# Altium PCB ECG_Monitor_Final.PcbDoc
Units mm, origin at the board's own origin, x right, y up, seen from the top; angles counter-clockwise.
Board outline 95 x 87 mm, 2 copper layers (Top Layer, Bottom Layer); 58 components, 40 nets, 156 pads, 1 vias.
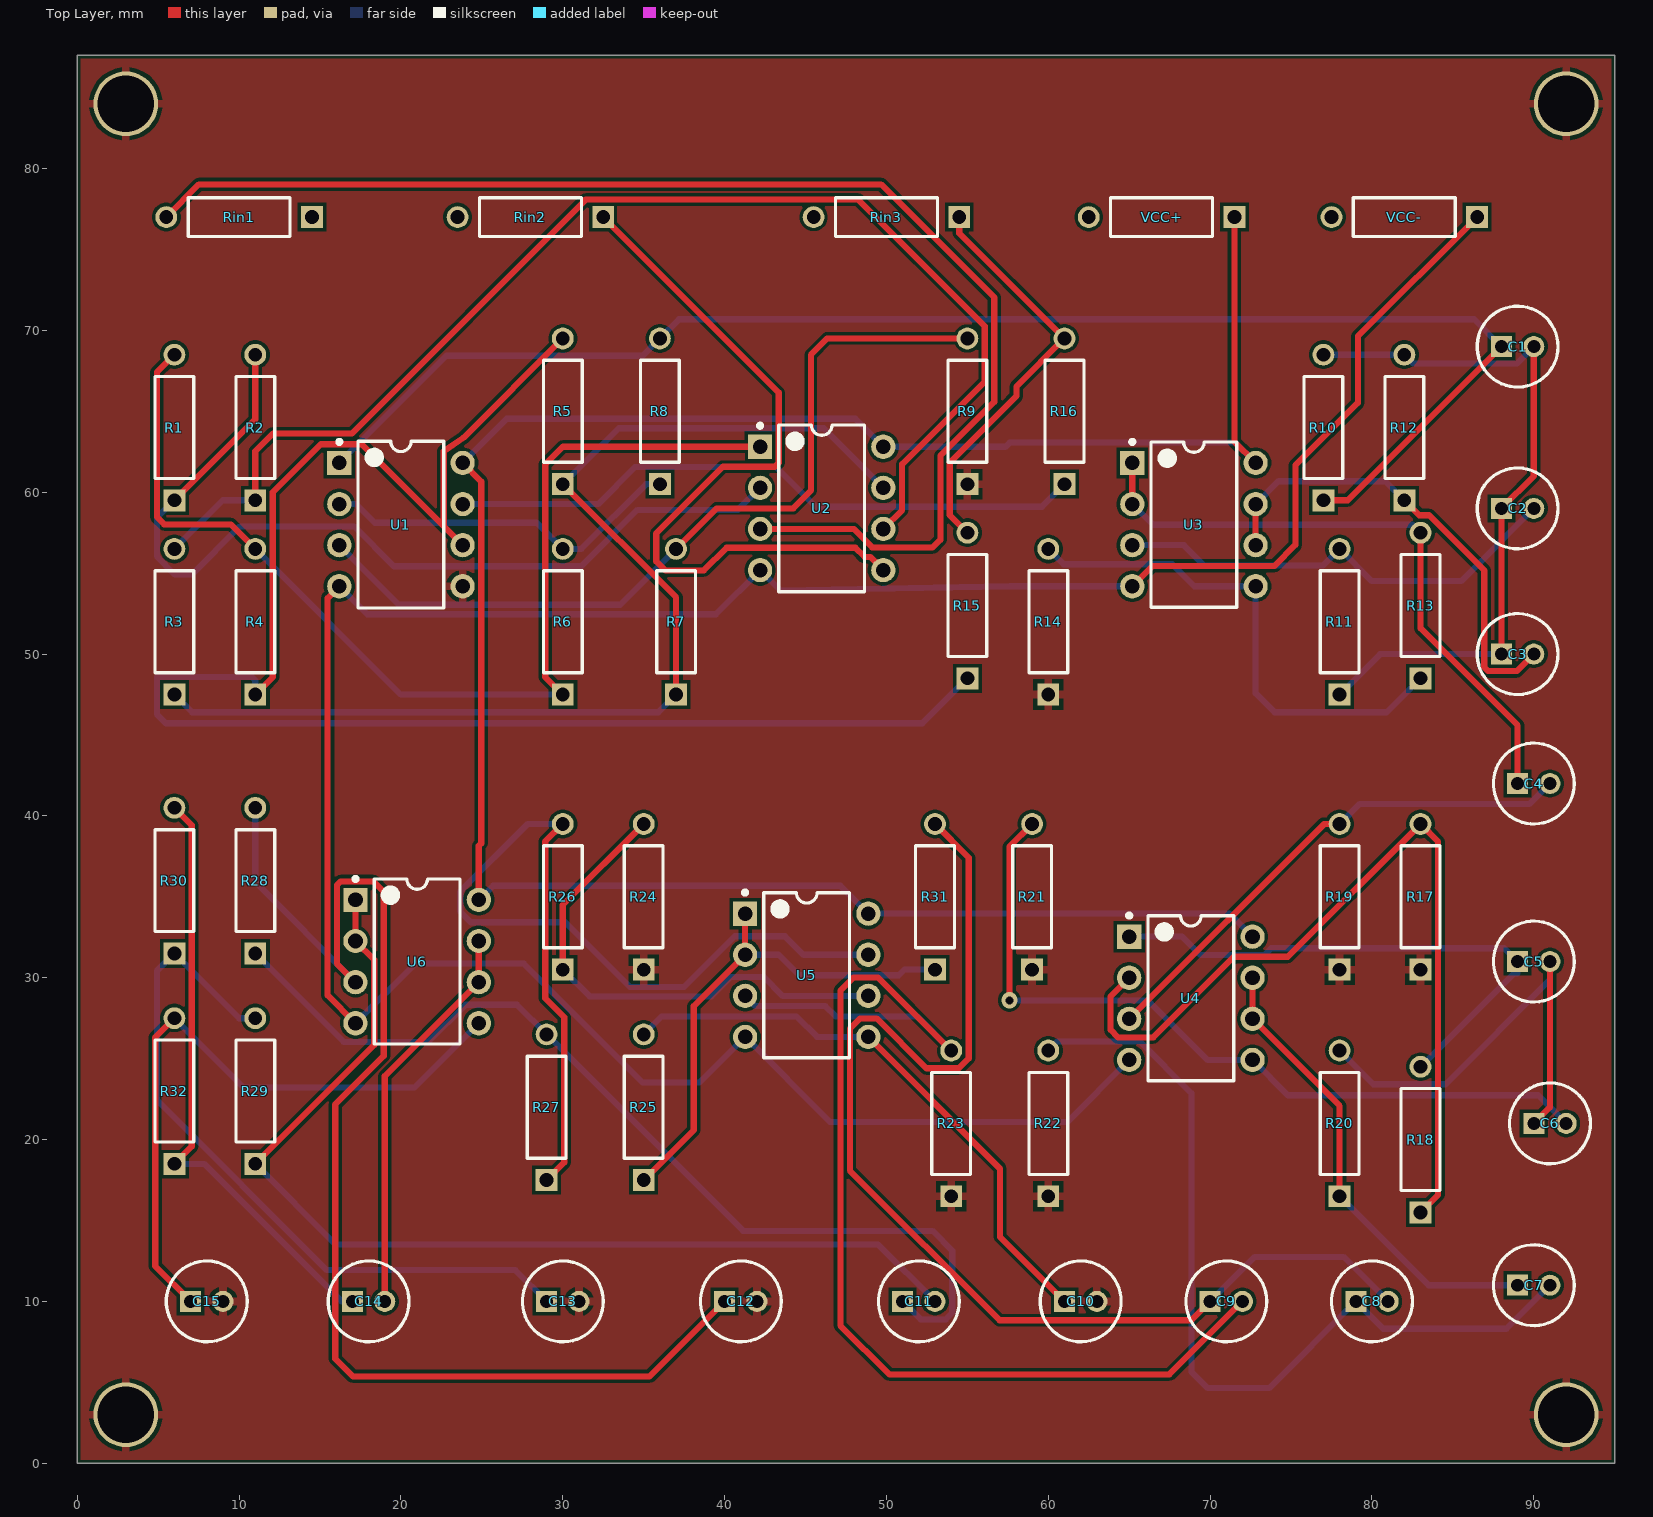
[diagram p0: Top Layer view]
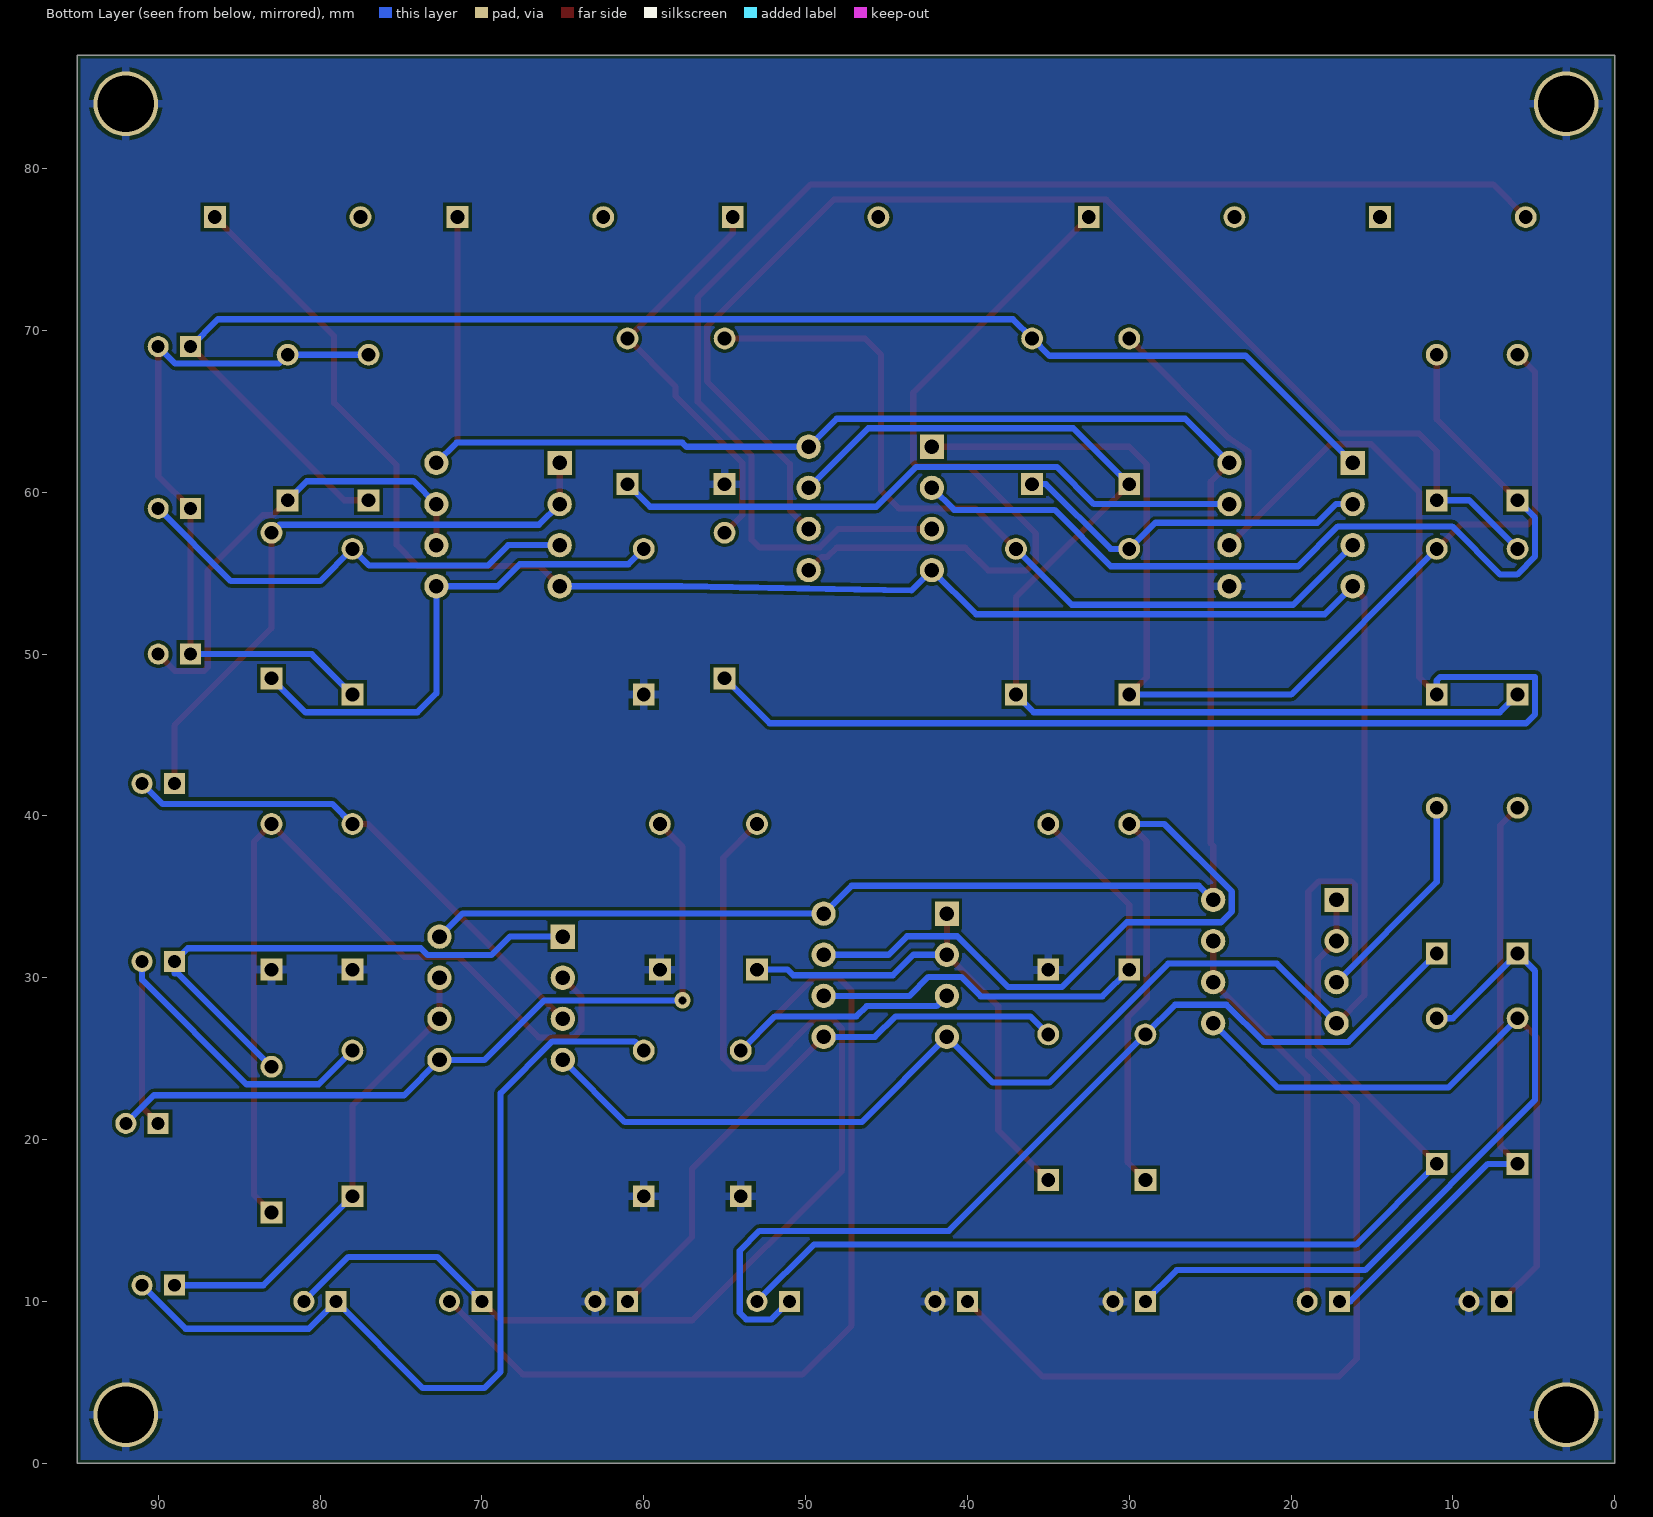
[diagram p1: Bottom Layer view, seen from below]

## Layer stack, top to bottom
Top Solder: solder mask 0.0102, Solder Resist, Dk 3.5
Top Layer: signal copper 0.0356
Dielectric 1: dielectric 0.32, FR-4, Dk 4.8
Bottom Layer: signal copper 0.0356
Bottom Solder: solder mask 0.0102, Solder Resist, Dk 3.5

## Board outline
0,0 95,0 95,87 0,87

## Design rules (kind name [scope] priority, off if disabled: settings)
BoardOutlineClearance [All] p1: gap=0.2 ignorepadtopadclearanceinfootprint=FALSE except(0.4: Arc-SplitBarrior Arc-SplitContinuation Track-SplitBarrior Track-SplitContinuation SMDPad-SplitBarrior SMDPad-SplitContinuation THPad-SplitBarrior THPad-SplitContinuation Via-SplitBarrior Via-SplitContinuation Fill-SplitBarrior Fill-SplitContinuation Poly-SplitBarrior Poly-SplitContinuation Region-SplitBarrior Region-SplitContinuation Text-SplitBarrior Text-SplitContinuation)
Clearance "Clearance Bottom Layer" [OnLayer('Bottom Layer')] p1: gap=0.203 ignorepadtopadclearanceinfootprint=TRUE except(0.254: Arc-Text Track-Text SMDPad-Text THPad-Text Via-Text Fill-Text Poly-Text Region-Text Text-Text)
Clearance "Clearance Top Layer" [OnLayer('Top Layer')] p2: gap=0.203 ignorepadtopadclearanceinfootprint=TRUE except(0.254: Arc-Text Track-Text SMDPad-Text THPad-Text Via-Text Fill-Text Poly-Text Region-Text Text-Text)
Clearance [All] p3: gap=0.2 ignorepadtopadclearanceinfootprint=FALSE except(0.089: Arc-Arc Arc-Track Arc-SMDPad Track-Track Track-SMDPad SMDPad-SMDPad; 0.127: Arc-Via Track-Via SMDPad-Via THPad-Via Via-Via; 0.254: Arc-Text Track-Text SMDPad-Text THPad-Text Via-Text Fill-Text Poly-Text Region-Text Text-Text)
HoleSize [All] p1: absolutevalues=TRUE maxlimit=6.3 minlimit=0.2 maxpercent=80.000 minpercent=20.000
MinimumAnnularRing [All] p1: minimumring=0.076
MinimumSolderMaskSliver [All] p1: minsoldermaskwidth=0.1
PolygonConnect PolygonConnect_1 [All] p1: thpad.connectstyle=Relief thpad.reliefconductorwidth=0.508 thpad.reliefentries=4 thpad.polygonreliefangle="90 Angle" thpad.airgapwidth=0.254 smdpad.connectstyle=Relief smdpad.reliefconductorwidth=0.508 smdpad.reliefentries=4 smdpad.polygonreliefangle="90 Angle" smdpad.airgapwidth=0.254 via.connectstyle=Direct via.reliefconductorwidth=0.508 via.reliefentries=4 via.polygonreliefangle="90 Angle" via.airgapwidth=0.254
RoutingCorners [All] p1: cornerstyle=Round minsetback=2.54 maxsetback=2.54
RoutingVias [All] p1: holewidth=0.5 width=1 viastyle="Through Hole" minholewidth=0.2 minwidth=0.45 maxholewidth=1 maxwidth=2
SilkToSilkClearance [All] p1: silktosilkclearance=0.1
SilkToSolderMaskClearance [IsPad] p1: minsilkscreentomaskgap=0.1 clearancetoexposedcopper=TRUE
SolderMaskExpansion [All] p1: expansion=0.102 istentingtop=FALSE
Width [All] p1: maxlimit=2.54 minlimit=0.089 preferedwidth=0.381
25 further rules are at their usual default settings.

## Components (designator, comment, footprint, x,y, rotation, side; value= is the part's Value field where it differs from the comment)
C1 "ECA1HM100" CAPPR55-200-1100X500X1200 89,69 r0 top
C2 "ECA1HM100" CAPPR55-200-1100X500X1200 89,59 r0 top
C3 "ECA1HM100" CAPPR55-200-1100X500X1200 89,50 r0 top
C4 "ECA1HM100" CAPPR55-200-1100X500X1200 90,42 r0 top
C5 "ECA1HM100" CAPPR55-200-1100X500X1200 90,31 r0 top
C6 "ECA1HM100" CAPPR55-200-1100X500X1200 91,21 r0 top
C7 "ECA1HM100" CAPPR55-200-1100X500X1200 90,11 r0 top
C8 "ECA1HM100" CAPPR55-200-1100X500X1200 80,10 r0 top
C9 "ECA1HM100" CAPPR55-200-1100X500X1200 71,10 r0 top
C10 "ECA1HM100" CAPPR55-200-1100X500X1200 62,10 r0 top
C11 "ECA1HM100" CAPPR55-200-1100X500X1200 52,10 r0 top
C12 "ECA1HM100" CAPPR55-200-1100X500X1200 41,10 r0 top
C13 "ECA1HM100" CAPPR55-200-1100X500X1200 30,10 r0 top
C14 "ECA1HM100" CAPPR55-200-1100X500X1200 18,10 r0 top
C15 "ECA1HM100" CAPPR55-200-1100X500X1200 8,10 r0 top
R1 "" RESA60-630X240 6,64 r90 top
R2 "" RESA60-630X240 11,64 r90 top
R3 "" RESA60-630X240 6,52 r90 top
R4 "" RESA60-630X240 11,52 r90 top
R5 "" RESA60-630X240 30,65 r90 top
R6 "" RESA60-630X240 30,52 r90 top
R7 "" RESA60-630X240 37,52 r90 top
R8 "" RESA60-630X240 36,65 r90 top
R9 "" RESA60-630X240 55,65 r90 top
R10 "" RESA60-630X240 77,64 r90 top
R11 "" RESA60-630X240 78,52 r90 top
R12 "" RESA60-630X240 82,64 r90 top
R13 "" RESA60-630X240 83,53 r90 top
R14 "" RESA60-630X240 60,52 r90 top
R15 "" RESA60-630X240 55,53 r90 top
R16 "" RESA60-630X240 61,65 r90 top
R17 "" RESA60-630X240 83,35 r90 top
R18 "" RESA60-630X240 83,20 r90 top
R19 "" RESA60-630X240 78,35 r90 top
R20 "" RESA60-630X240 78,21 r90 top
R21 "" RESA60-630X240 59,35 r90 top
R22 "" RESA60-630X240 60,21 r90 top
R23 "" RESA60-630X240 54,21 r90 top
R24 "" RESA60-630X240 35,35 r90 top
R25 "" RESA60-630X240 35,22 r90 top
R26 "" RESA60-630X240 30,35 r90 top
R27 "" RESA60-630X240 29,22 r90 top
R28 "" RESA60-630X240 11,36 r90 top
R29 "" RESA60-630X240 11,23 r90 top
R30 "" RESA60-630X240 6,36 r90 top
R31 "" RESA60-630X240 53,35 r90 top
R32 "" RESA60-630X240 6,23 r90 top
Rin1 "" RESA60-630X240 10,77 r180 top
Rin2 "" RESA60-630X240 28,77 r180 top
Rin3 "" RESA60-630X240 50,77 r180 top
U1 "LM4562NA" N08E 20,58 r0 top
U2 "LM4562NA" N08E 46,59 r0 top
U3 "TL072CP" P0008A 69,58 r0 top
U4 "TL072CP" P0008A 68.81,28.73 r0 top
U5 "TL072CP" P0008A 45.074,30.151 r0 top
U6 "TL072CP" P0008A 21,31 r0 top
VCC+ "" RESA60-630X240 67,77 r180 top
VCC- "" RESA60-630X240 82,77 r180 top

## Footprints (in the part's own frame and the unit in brackets; to place one, negate y for a bottom-side part, rotate by r counter-clockwise, add the part's x,y. Pads: shape width x height; smd on the part's side, far side on the other; paste and mask are expansions set on the pad)
CAPPR55-200-1100X500X1200 [mm] "THD, 2-Leads, Dia 5mm, Body Length 11mm"
  rect 1.3x1.3 hole 0.8: 1(-1,0)
  round 1.3 hole 0.8: 2(1,0)
  silkscreen extent -2.5,-2.5 2.5,2.5, body extent -2.5,-2.5 2.5,2.5, height 12
N08E [mm] "DIP, 8-Pin, Row Spacing 7.62 mm, Pitch 2.54 mm"
  rect 1.5x1.5 hole 0.9: 1(-3.81,3.81)
  round 1.5 hole 0.9: 2(-3.81,1.27) 3(-3.81,-1.27) 4(-3.81,-3.81) 5(3.81,-3.81) 6(3.81,-1.27) 7(3.81,1.27) 8(3.81,3.81)
  silkscreen extent -3.93,-5.15 2.65,5.23, body extent -3.6,-5.15 3.6,5.15, height 5.33
P0008A [mm] "DIP, 8-Leads, Body 10.15x6.6mm, Pitch 2.54mm"
  rect 1.5x1.5 hole 0.9: 1(-3.81,3.81)
  round 1.5 hole 0.9: 2(-3.81,1.27) 3(-3.81,-1.27) 4(-3.81,-3.81) 5(3.81,-3.81) 6(3.81,-1.27) 7(3.81,1.27) 8(3.81,3.81)
  silkscreen extent -3.93,-5.1 2.65,5.23, body extent -3.95,-5.07 3.95,5.07, height 5.08
RESA60-630X240 [mm] "Axial Resistor, 2-Leads, Dia 2.4mm, Body Length 6.3mm"
  rect 1.35x1.35 hole 0.85: 1(-4.5,0)
  round 1.35 hole 0.85: 2(4.5,0)
  silkscreen extent -3.15,-1.2 3.15,1.2, body extent -3.15,-1.2 3.15,1.2, height 2.4

## Part data
C1 C2 C3 C4 C5 C6 C7 C8 C9 C10 C11 C12 C13 C14 C15: library part CMP-1665-00038-2, "Aluminum Electrolytic Capacitor, 10 uF, +/- 20%, 50 V, -40 to 85 degC, 2-Pin THD, RoHS, Bulk", Capacitance=10uF, Case/Package=Radial, Dielectric Material=Aluminium, Leakage Current=3uA, Manufacturer=Panasonic, Max Operating Temperature=85degC, Min Operating Temperature=-40degC, Package Description="2-Pin Radial Lead, Dia 5 mm, Height 12 mm", Package Quantity=200, Package Reference=CAPPR55-200-1100X500X1200, Ripple Current=65mA, Tolerance=20%, Voltage=50V, Datasheet URL=https://industrial.panasonic.com/cdbs/www-data/pdf/RDF0000/ABA0000C1218.pdf, Datasheet Version="Rev. 05, 10/2016", Diameter=5mm, Dissipation Factor=0.12%, Height=11mm, Height - Seated (Max)=0.472inch, Lead Diameter=0.5mm, Lead Free=LeadFree, Lead Pitch=2mm, Lead/Base Style=Straight, Length=11mm, Life (Hours)=2000Hour, Manufacturer URL=http://www.panasonic.com/, Mount=ThroughHole, Number of Pins=2, Packaging=Bulk, Radiation Hardening=No, REACH SVHC=NoSVHC, Ripple Current (AC)=65mA, RoHSCompliant=true, Termination=Radial, Voltage Rating=50V, Voltage Rating (DC)=50V
R1 R2 R3 R4 R5 R6 R7 R8 R9 R10 R11 R12 R13 R14 R15 R16 R17 R18 R19 R20 R21 R22 R23 R24 R25 R26 R27 R28 R29 R30 R31 R32 Rin1 Rin2 Rin3 VCC+ VCC-: library part CMP-1659-00072-1, "Axial Resistor, 221 Ohm, +/- 1%, 250 mW, -55 to 155 degC, 2-Pin THD, RoHS, Bulk", Case\Package=QFN, Max Operating Temperature="85 degC", Max Supply Voltage="3.6 V", Min Operating Temperature="-40 degC", Min Supply Voltage="1.95 V", Nominal Supply Voltage="2.5 V", Package Quantity=1000, Bandwidth="800 Hz", ComponentLink1Description="Manufacturer URL", ComponentLink1URL=http://www.yageo.com/, ComponentLink2Description=Datasheet, ComponentLink2URL=http://www.yageo.com/documents/recent/Yageo%20LR_MFR_2013.pdf, DatasheetVersion=Apr-13, Height="0.95 mm", Interface=I2C, Length="3 mm", Mount="Surface Mount", PackageDescription="2-Pin Axial Lead, Dia 2.4 mm, Body Length 6.3 mm", PackageReference=MFR-25, Packaging="Tape and Reel", Pins=16, Radiation Hardening=No, REACH SVHC="No SVHC", RoHSCompliant=true, Weight="0.001122 oz"
U1 U2: library part CMP-0057-00043-2, "Dual High Performance, High Fidelity Audio Operational Amplifier, 8-pin MDIP", Manufacturer="National Semiconductor", PackageTopMarking=NSUZXYTT*LM*4562NA, PowerWise=Y, Code_JEDEC=MS-001-BA, ComponentLink1Description="LM4562 Datasheet", ComponentLink1URL=http://www.national.com/ds/LM/LM4562.pdf, ComponentLink2Description="LM4562 Web Page", ComponentLink2URL=http://www.national.com/pf/LM/LM4562.html, ComponentLink3Description="N08E Package Page", ComponentLink3URL=http://www.national.com/packaging/folders/n08e.html, CompType="Audio IC", DatasheetVersion=Jan-2010, PackageDescription="MDIP, .365 x .250 x .130in, 8 Lead, .100in Pitch", PackageReference=N08E, PackageVersion="revG, May-2006", PinCount=8, RevisionNote="Component URLs added", RoHS=Y
U3 U4 U5 U6: library part CMP-0017-00950-2, "Dual Low-Noise JFET-Input General-Purpose Operational Amplifier, 7 to 36 V, 0 to 70 degC, 8-pin DIP (P8), Pb-Free (RoHS)", Manufacturer="Texas Instruments", Rating=Catalog, Total Supply Voltage(Max)(+5V is 5, +/-5V is 10)=36, Total Supply Voltage(Min)(+5V is 5, +/-5V is 10)=7, CMRR(Min)(dB)=70, Code_JEDEC=MS-001, ComponentLink1Description="Manufacturer URL", ComponentLink1URL=http://www.ti.com/, ComponentLink2Description=Datasheet, ComponentLink2URL=http://www.ti.com/lit/ds/symlink/tl072.pdf, ComponentLink3Description="Package Specification", ComponentLink3URL=http://www.ti.com/litv/pdf/mpdi001b, DatasheetVersion=SLOS080J, Eco-Plan="Pb-Free (RoHS)", GBW(Typ)(MHz)=3, IIB(Max)(pA)=200, Iq per channel(Max)(mA)=2.5, Mounting Technology="Through Hole", Number of Channels=2, Offset Drift(Typ)(uV/C)=18, PackageDescription="8-Pin Plastic In-Line, Body 9.59 x 6.35 mm, Pitch 2.54 mm", PackageReference=P0008A, PackageVersion="4040082/E, 04/2010", PartNumber=TL072CP, Slew Rate(Typ)(V/us)=13, Sub Family="General Purpose Amplifier, High Supply Voltage Amplifier (>=30V)", Vio (25C)(Max)(mV)=10, Vn at 1kHz(Typ)(nV/rtHz)=18

## Free pads (board coordinates)
  round 4 hole 3.5: 16(92,84) 17(3,84) 18(3,3) 19(92,3)

## Via types
v1: diameter 1, hole 0.5, Top Layer to Bottom Layer, 1 vias

## Nets (pads, with @x,y where several pads share a name; then routed paths per layer and width w, separated by ;. In a path a pad name is that pad's centre, name@x,y a point inside that pad or via, vN(x,y) a via of type N, cw(c..) or ccw(c..) an arc to the next point about the centre after c; other vN are vias at no path point)
GND: C10.2 C12.2 C13.2 C15.2 pad.16 pad.17 pad.18 pad.19 R9.1 R14.1 R17.1 R19.1 R21.1 R22.1 R23.1 R24.1 U1.5
NetC1_1: C1.1 R8.2 R10.1 U1.1 | length 91.1
  Top Layer w0.381: R10.1 78.5,59.5 C1.1
  Bottom Layer w0.381: U1.1 22.809,68.429 34.929,68.429 R8.2 37.189,70.689 86.311,70.689 C1.1
NetC1_2: C1.2 C2.1 C3.1 R10.2 R11.1 R12.2 | length 44.5
  Top Layer w0.381: C3.1 C2.1 90,61 C1.2
  Bottom Layer w0.381: R10.2 R12.2 82.554,67.946 88.946,67.946 C1.2 ; R11.1 80.5,50 C3.1
NetC2_2: C2.2 R11.2 U3.3 | length 28.4
  Bottom Layer w0.381: U3.3 68.366,56.73 69.621,55.475 76.975,55.475 R11.2 79.99,54.51 85.51,54.51 C2.2
NetC3_2: C3.2 R12.1 U3.6 U3.7 | length 29.1
  Top Layer w0.381: U3.6 U3.7 ; R12.1 82.926,58.574 83.53,58.574 86.933,55.17 86.933,49.201 87.187,48.947 88.947,48.947 C3.2
  Bottom Layer w0.381: U3.7 74.222,60.682 80.818,60.682 R12.1
NetC4_1: C4.1 R13.2 U3.1 U3.2 | length 39.1
  Top Layer w0.381: U3.2 U3.1 ; R13.2 83,51.589 89,45.589 C4.1
  Bottom Layer w0.381: U3.2 66.471,57.989 82.511,57.989 R13.2
NetC4_2: C4.2 R19.2 U4.3 | length 32
  Top Layer w0.381: U4.3 77.04,39.5 R19.2
  Bottom Layer w0.381: R19.2 79.243,40.743 89.743,40.743 C4.2
NetC5_1: C5.1 R18.2 U4.1 | length 34.1
  Bottom Layer w0.381: U4.1 68.263,32.54 69.406,31.396 73.345,31.396 73.776,31.827 88.173,31.827 C5.1 89,30.278 88.778,30.278 R18.2
NetC5_2: C5.2 C6.1 R20.2 | length 28.1
  Top Layer w0.381: C6.1 91,22 C5.2
  Bottom Layer w0.381: R20.2 80.08,23.42 84.546,23.42 91,29.874 C5.2
NetC6_2: C6.2 R21.2 U4.5 | length 49
  Top Layer w0.381: v1(57.596,28.604) 57.596,38.096 R21.2
  Bottom Layer w0.381: v1(57.596,28.604) 66.144,28.604 69.827,24.92 U4.5 74.806,22.734 90.266,22.734 C6.2
NetC7_1: C7.1 R20.1 U4.6 U4.7 | length 29
  Top Layer w0.381: U4.7 U4.6 78,22.08 R20.1
  Bottom Layer w0.381: R20.1 83.5,11 C7.1
NetC7_2: C7.2 C8.1 R22.2 | length 54.2
  Bottom Layer w0.381: R22.2 60.564,26.064 65.646,26.064 68.848,22.861 68.848,5.64 69.839,4.649 73.649,4.649 C8.1 80.693,8.307 88.307,8.307 C7.2
NetC8_2: C8.2 C9.1 R31.2 | length 73.1
  Top Layer w0.381: R31.2 55.082,37.418 55.082,25.02 54.472,24.411 52.465,24.411 49.391,27.485 48.376,27.485 47.74,26.849 47.74,18.087 56.987,8.84 68.84,8.84 C9.1
  Bottom Layer w0.381: C9.1 72.752,12.752 78.248,12.752 C8.2
NetC9_2: C9.2 R23.2 U5.3 | length 71.9
  Top Layer w0.381: R23.2 49.475,30.025 47.97,30.025 47.156,29.211 47.156,8.511 50.179,5.488 67.488,5.488 C9.2
  Bottom Layer w0.381: U5.3 41.899,28.246 46.217,28.246 46.852,27.611 51.889,27.611 R23.2
NetC10_1: C10.1 R25.2 U5.5 | length 36.2
  Top Layer w0.381: U5.5 57.012,18.213 57.012,13.988 C10.1
  Bottom Layer w0.381: R25.2 36.111,27.611 44.439,27.611 45.709,26.341 U5.5
NetC11_1: C11.1 R27.2 R28.1 | length 60.1
  Bottom Layer w0.381: R28.1 16.464,26.036 21.694,26.036 23.992,28.334 27.166,28.334 R27.2 41.148,14.352 52.846,14.352 54.066,13.133 54.066,9.298 53.659,8.891 52.109,8.891 C11.1
NetC11_2: C11.2 R29.1 U6.1 U6.2 | length 65.4
  Top Layer w0.381: R29.1 18.353,25.853 18.353,31.107 U6.2 U6.1
  Bottom Layer w0.381: R29.1 15.986,13.514 49.486,13.514 C11.2
NetC12_1: C12.1 R28.2 U6.3 | length 79.6
  Top Layer w0.381: U6.3 16.046,30.874 16.046,35.73 16.27,35.954 18.302,35.954 18.937,35.319 18.937,25.173 15.94,22.175 15.94,6.453 17.032,5.361 35.361,5.361 C12.1
  Bottom Layer w0.381: R28.2 11,35.92 U6.3
NetC13_1: C13.1 R29.2 R30.1 | length 45.4
  Bottom Layer w0.381: R29.2 10,27.5 R30.1 4.917,30.417 4.917,22.446 15.423,11.939 27.061,11.939 C13.1
NetC14_1: C14.1 R30.2 R32.1 | length 37.4
  Top Layer w0.381: R32.1 7.076,19.576 7.076,39.424 R30.2
  Bottom Layer w0.381: R32.1 7.837,18.5 16.337,10 C14.1
NetC14_2: C14.2 U6.6 U6.7 | length 24.7
  Top Layer w0.381: C14.2 19,23.92 U6.6 U6.7
NetC15_1: C15.1 R32.2 U6.5 | length 41.1
  Top Layer w0.381: R32.2 4.815,26.315 4.815,12.185 C15.1
  Bottom Layer w0.381: R32.2 10.283,23.217 20.837,23.217 U6.5
NetR1_1: R1.1 R2.2 U2.2 | length 57
  Top Layer w0.381: R1.1 11,64.5 R2.2
  Bottom Layer w0.381: R1.1 4.917,58.417 4.917,56.034 6.034,54.916 7.076,54.916 10.047,57.888 17.109,57.888 19.565,55.431 31.137,55.431 34.609,58.904 40.824,58.904 U2.2
NetR1_2: R1.2 R4.2 R6.1 U2.1 | length 68.5
  Top Layer w0.381: R1.2 4.917,67.417 4.917,58.472 5.374,58.015 9.485,58.015 R4.2 ; R6.1 28.92,48.58 28.92,61.723 30.006,62.81 U2.1
  Bottom Layer w0.381: R4.2 20,47.5 R6.1
NetR2_1: R2.1 R3.2 U2.6 | length 79.2
  Top Layer w0.381: R2.1 11,62.536 12.092,63.628 16.956,63.628 31.409,78.081 48.249,78.081 56.072,70.258 56.072,66.836 50.967,61.731 50.967,58.887 U2.6
  Bottom Layer w0.381: R3.2 9,59.5 R2.1
NetR3_1: R3.1 R5.1 R7.1 U2.7 | length 70.6
  Top Layer w0.381: R5.1 37,53.5 R7.1
  Bottom Layer w0.381: R3.1 7.093,46.407 35.907,46.407 R7.1 ; R5.1 33.454,63.954 46.126,63.954 U2.7
NetR4_1: R4.1 R5.2 R15.1 U1.6 | length 104.1
  Top Layer w0.381: R4.1 12.079,48.579 12.079,59.996 15.051,62.968 17.572,62.968 22.646,57.894 ; U1.6 22.646,57.894 ; R5.2 23.874,63.374 22.646,62.536 22.646,57.894
  Bottom Layer w0.381: R4.1 11,48.375 10.784,48.591 4.917,48.591 4.917,46.28 5.475,45.721 52.221,45.721 R15.1
NetR6_2: R6.2 R8.1 U1.2 | length 22.6
  Bottom Layer w0.381: U1.2 17.232,59.27 18.386,58.116 28.384,58.116 R6.2 31.143,56.5 35.143,60.5 R8.1
NetR7_2: R7.2 R9.2 U1.3 | length 52.1
  Top Layer w0.381: R7.2 39.505,59.005 44.236,59.005 45.328,60.098 45.328,68.484 46.344,69.5 R9.2
  Bottom Layer w0.381: U1.3 19.874,53.046 33.546,53.046 R7.2
NetR13_1: R13.1 R14.2 U3.5 | length 31.9
  Bottom Layer w0.381: R14.2 60.949,55.551 67.655,55.551 69.016,54.19 U3.5 72.81,47.576 73.979,46.407 80.907,46.407 R13.1
NetR15_2: R15.2 R16.2 Rin3.1 | length 25.6
  Top Layer w0.381: Rin3.1 54.5,76 R16.2 58.032,66.532 58.032,65.945 53.913,61.826 53.913,58.587 R15.2
NetR16_1: R16.1 U1.7 | length 39.7
  Bottom Layer w0.381: U1.7 32.181,59.27 34.48,61.569 43.166,61.569 45.628,59.107 59.607,59.107 R16.1
NetR17_2: R17.2 R18.1 U4.2 | length 53.4
  Top Layer w0.381: U4.2 63.845,28.845 63.845,26.773 64.302,26.316 66.486,26.316 71.465,31.294 74.794,31.294 R17.2 84.088,38.412 84.088,16.588 R18.1
NetR24_2: R24.2 R26.1 U5.6 | length 31.6
  Top Layer w0.381: R26.1 30,34.5 R24.2
  Bottom Layer w0.381: R26.1 31.653,28.847 39.173,28.847 40.375,30.049 42.407,30.049 43.575,28.881 U5.6
NetR25_1: R25.1 R31.1 U5.1 U5.2 | length 31.5
  Top Layer w0.381: R25.1 38.089,20.589 38.089,28.246 U5.2 U5.1
  Bottom Layer w0.381: U5.2 43.334,31.421 44.604,30.151 50.764,30.151 51.113,30.5 R31.1
NetR26_2: R26.2 R27.1 U5.7 | length 61.6
  Top Layer w0.381: R27.1 30.088,18.588 30.088,27.56 28.92,28.729 28.92,38.42 R26.2
  Bottom Layer w0.381: R26.2 27.829,39.5 23.662,35.333 23.662,34.088 24.322,33.428 30.156,33.428 34.152,29.431 37.496,29.431 40.629,32.565 43.727,32.565 44.871,31.421 U5.7
NetRin1_2: Rin1.2 U2.3 | length 83
  Top Layer w0.381: Rin1.2 7.521,79.021 49.671,79.021 56.656,72.036 56.656,65.585 53.329,62.258 53.329,57.069 52.846,56.586 49.119,56.586 47.975,57.73 U2.3
NetRin2_1: Rin2.1 U2.5 | length 46.2
  Top Layer w0.381: Rin2.1 43.347,66.153 43.347,61.825 43.093,61.571 39.892,61.571 35.778,57.456 35.778,55.729 36.336,55.17 38.724,55.17 40.121,56.567 48.082,56.567 48.647,56.002 48.998,56.002 U2.5
NetU1_4: U1.4 U2.4 U3.4 U4.4 U5.4 U6.4 VCC-.1 | length 172.8
  Top Layer w0.381: U1.4 15.462,53.462 15.462,28.918 U6.4 ; U3.4 66.449,55.449 73.979,55.449 75.275,56.745 75.275,61.672 79.135,65.533 79.135,69.635 VCC-.1
  Bottom Layer w0.381: U1.4 17.918,52.462 39.462,52.462 U2.4 43.455,53.925 57.632,54.19 U3.4 ; U6.4 20.874,30.874 27.593,30.874 34.945,23.522 38.445,23.522 U5.4 46.522,21.083 61.163,21.083 U4.4
NetU1_8: U1.8 U2.8 U3.8 U4.8 U5.8 U6.8 VCC+.1 | length 144.2
  Top Layer w0.381: U1.8 24.957,60.663 24.957,38.304 24.81,38.157 U6.8 ; VCC+.1 71.5,63.12 U3.8
  Bottom Layer w0.381: U1.8 26.538,64.538 48.082,64.538 U2.8 57.362,62.81 57.622,63.069 71.551,63.069 U3.8 ; U6.8 25.689,35.689 47.156,35.689 U5.8 71.199,33.961 U4.8
pads on no net: Rin1.1 Rin2.2 Rin3.2 VCC+.2 VCC-.2

## Polygon pours and split planes (outlines as drawn)
GND on Top Layer "GND_L01_P000" (solid, pour order 0): 0,87 95,87 95,0 0,0
GND on Bottom Layer "GND_L02_P001" (solid, pour order 1): 0,87 95,87 95,0 0,0